# Altium PCB CFD_Chip_Test.PcbDoc (part 2 of 2)
Units mil, origin at the board's own origin, x right, y up, seen from the top; angles counter-clockwise.
Board outline 3185 x 3310 mil, 2 copper layers (Top Layer, Bottom Layer); 115 components, 90 nets, 432 pads, 99 vias.
Unrouted connection lines stored in the file: 1.
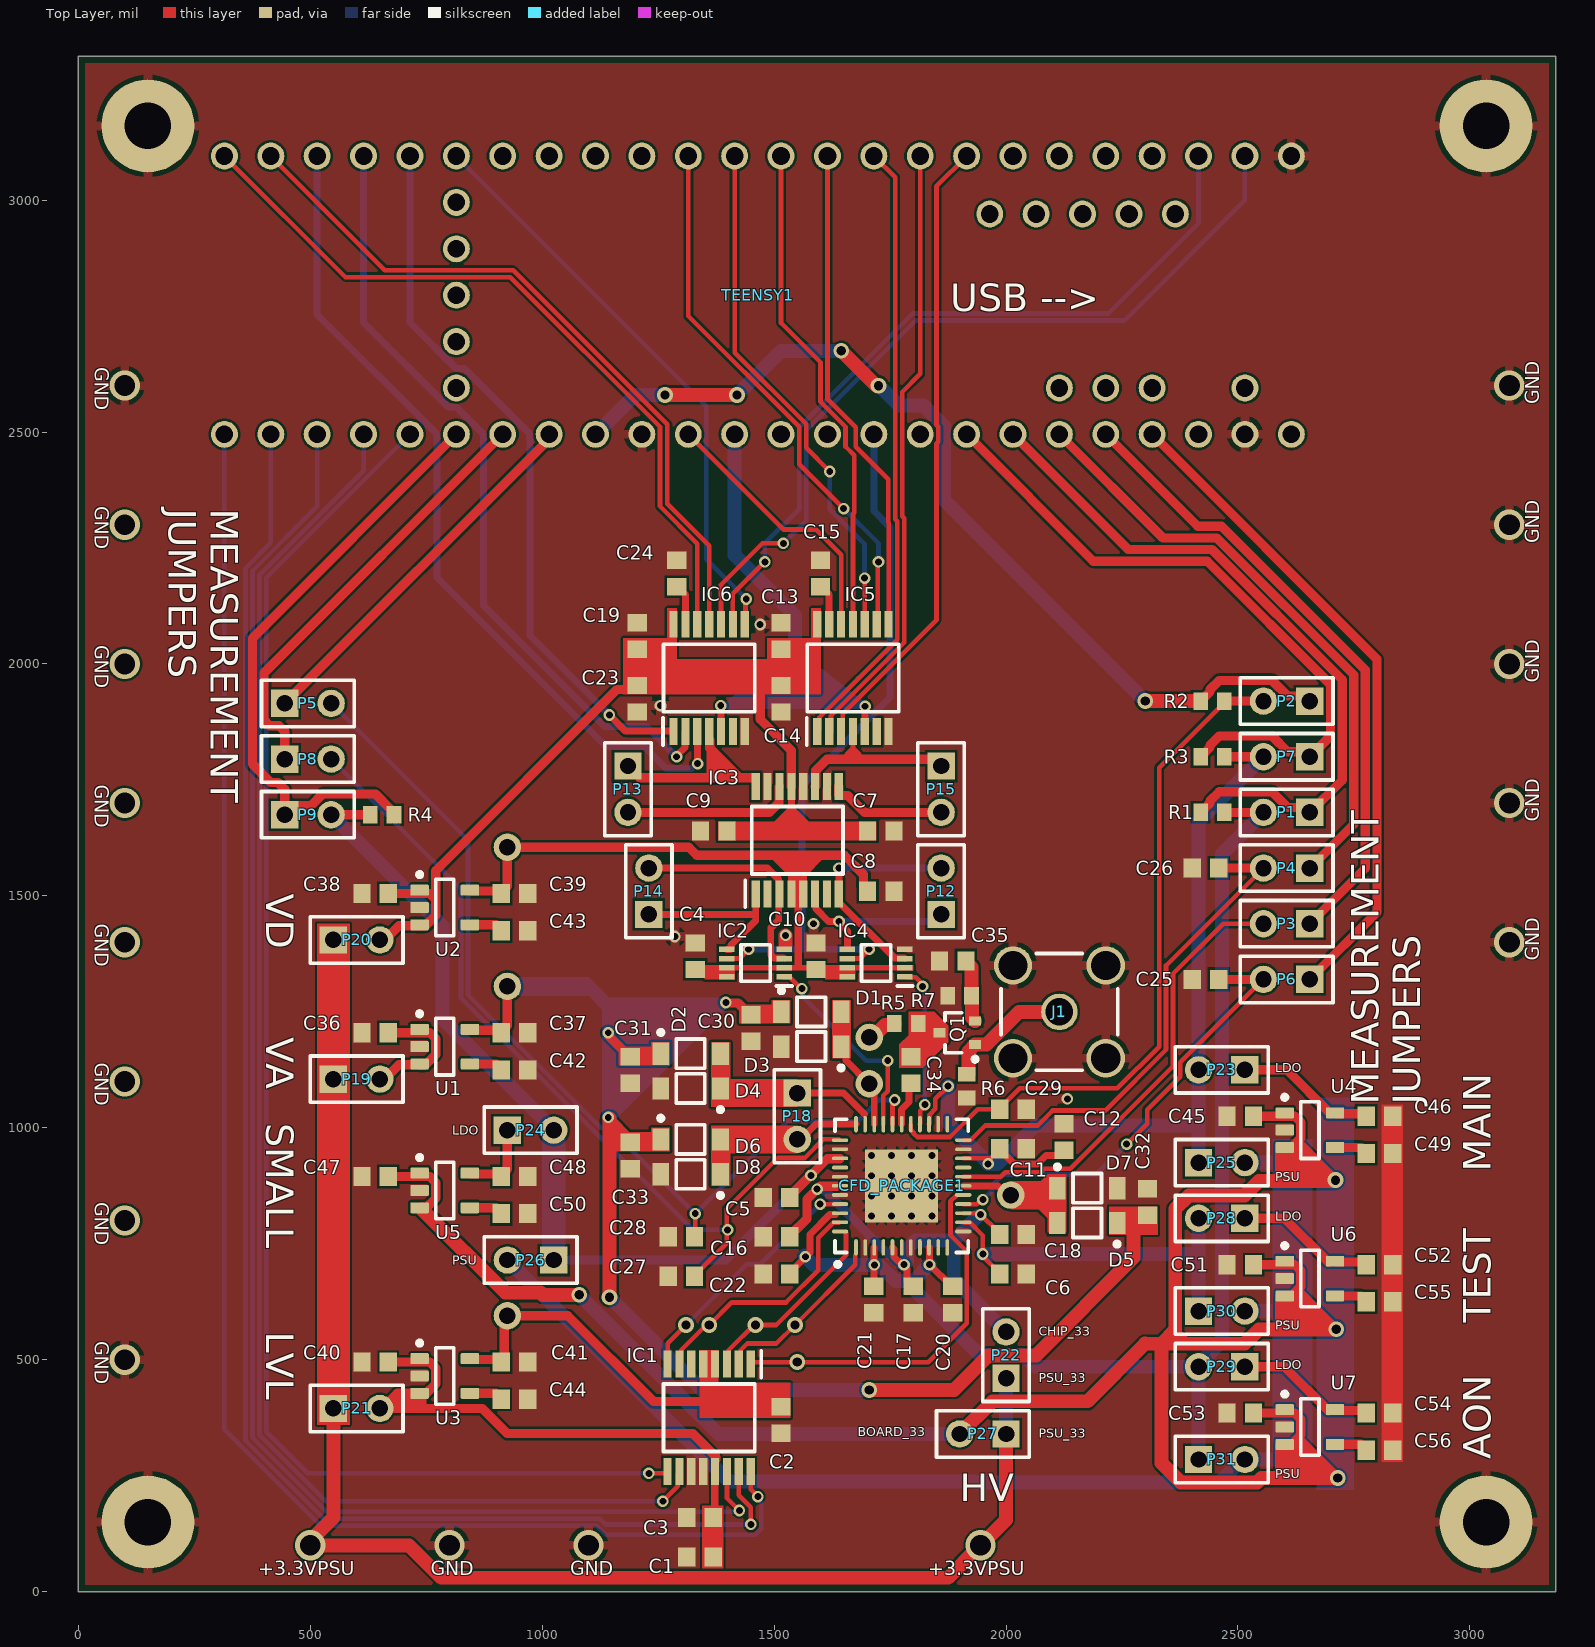
[diagram p0: Top Layer view]

## Silkscreen, mask and mechanical layers (free items; w line width, h text height) (continued)
Top Overlay: (continued)
  text "LDO" at 806.68,985 h20
  text "MAIN" at 3045,904.89 h60 r90
  text "PSU" at 2580,885 h20
  text "GND" at 35,839.99 h30 r270
  text "LDO" at 2580,800 h20
  text "PSU" at 806.68,705 h20
  text "TEST" at 3045,580.04 h60 r90
  text "PSU" at 2580,565 h20
  text "LVL" at 405.01,559.97 h60 r270
  text "CHIP_33" at 2070,551.67 h20
  text "GND" at 35,539.99 h30 r270
  text "LDO" at 2580,480 h20
  text "PSU_33" at 2070,451.67 h20
  text "BOARD_33" at 1680,335 h20
  text "PSU_33" at 2070,331.67 h20
  text "AON" at 3045,285.03 h60 r90
  text "PSU" at 2580,245 h20
  text "HV" at 1900.02,195.01 h60
  text "+3.3VPSU" at 387.54,35 h30
  text "GND" at 760.01,35 h30
  text "GND" at 1060.01,35 h30
  text "+3.3VPSU" at 1832.54,35 h30